# Altium PCB PWR_PCB2.PcbDoc (part 3 of 3)
Units mil, origin at the board's own origin, x right, y up, seen from the top; angles counter-clockwise.
Board outline 9000 x 6000 mil, 4 copper layers (Top Layer, GND Layer, Power Layer, Bottom Layer), stack 27.912 mil thick; 125 components, 92 nets, 479 pads, 4387 vias.
Unrouted connection lines stored in the file: 22.
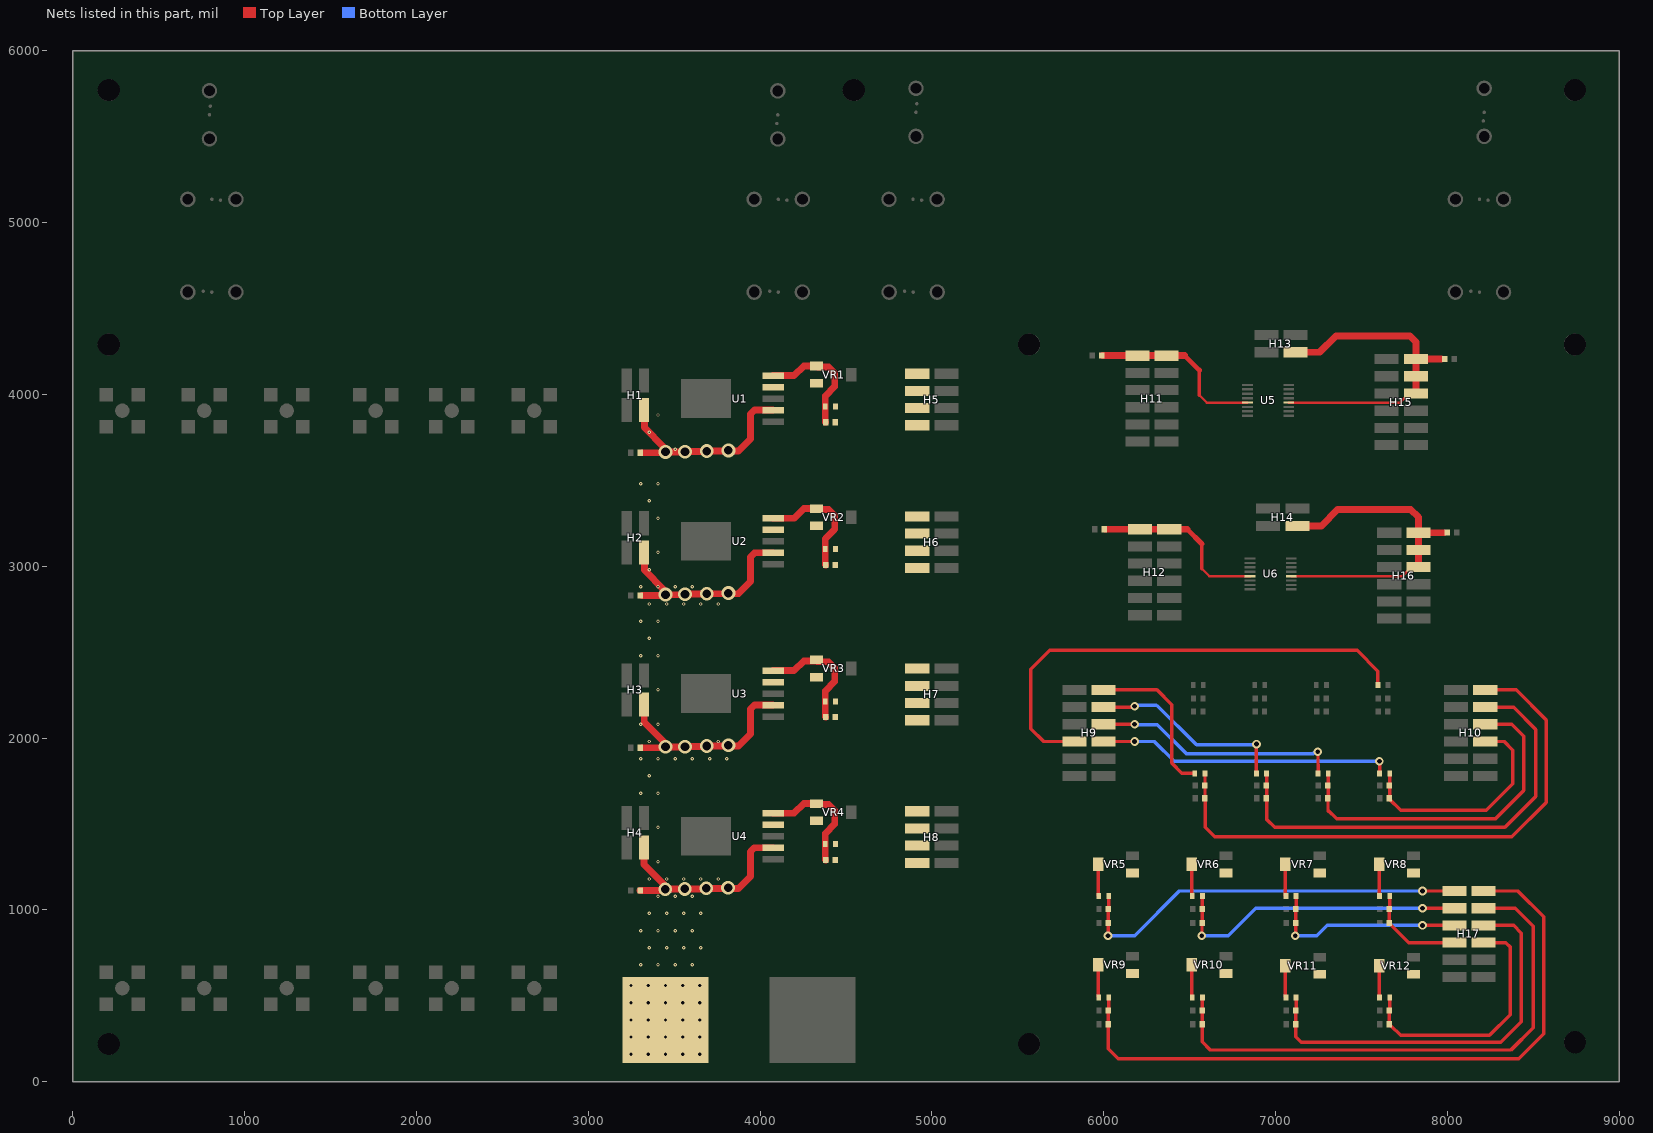
[diagram p5: the nets of this part, all layers, seen from the top]

## Via types
v1: diameter 20, hole 9, Top Layer to Bottom Layer, tented both sides, 2529 vias
v2: diameter 16, hole 8, Top Layer to Bottom Layer, 1158 vias
v3: diameter 20, hole 8, Top Layer to Bottom Layer, tented both sides, 408 vias
v4: diameter 16, hole 8, Top Layer to Bottom Layer, tented both sides, 156 vias
v5: diameter 50, hole 28, Top Layer to Bottom Layer, 70 vias
v6: diameter 30, hole 19, Top Layer to Bottom Layer, 50 vias
v7: diameter 80, hole 50, Top Layer to Bottom Layer, 16 vias

## Nets (pads, with @x,y where several pads share a name; then routed paths per layer and width w, separated by ;. In a path a pad name is that pad's centre, name@x,y a point inside that pad or via, vN(x,y) a via of type N, cw(c..) or ccw(c..) an arc to the next point about the centre after c; other vN are vias at no path point) (continued)
IREF3_M: H9.4 R8.2 | length 2826.5
  Top Layer w20: H9.4@5829.5,1980 5649.5,1980 5574.5,2055 5574.5,2400 5684.5,2510 7474.5,2510 7594.97,2389.53 R8.2@7594.97,2310
IREF4: C13.2 C21.2 H10.7 R9.1 | length 3309
  Top Layer w20: C21.2@6587.06,1650 6589.03,1651.97 6589.03,1725 R9.1@6589.03,1795 ; C21.2@6589.5,1645.06 6589.5,1480 6644.5,1425 8374.5,1425 8574.5,1625 8574.5,2105 8399.5,2280 H10.7@8219.5,2280
IREF4_M: H9.7 R9.2 | length 985.5
  Top Layer w20: H9.7@5944.5,2280 6309.5,2280 6394.5,2195 6394.5,1855 6454.5,1795 R9.2@6529.97,1795
IREF5: C14.2 C22.2 H10.8 R10.1 | length 2669.6
  Top Layer w20: R10.1@6947.36,1795 6947.36,1725 6947.36,1651.97 C22.2@6945.39,1650 6949.5,1645.89 6949.5,1525 6994.5,1480 8334.5,1480 8514.5,1660 8514.5,2050 8384.5,2180 H10.8@8219.5,2180
IREF5_M: H9.8 R10.2 | length 1200.5
  Top Layer w20: H9.8@5944.5,2180 6171.79,2180 6176.79,2185 v5(6179.5,2185) ; R10.2@6888.31,1795 6889.5,1796.19 6888.31,1797.39 6888.31,1964.81 v5(6888.5,1965)
  Bottom Layer w20: v5(6179.5,2185) 6184.5,2190 6304.5,2190 ; 6314.5,2185 6539.5,1960 6879.5,1960 v5@6884.5,1965
IREF6: C15.2 C23.2 H10.9 R11.1 | length 2014.7
  Top Layer w20: 7304.5,1575 7304.5,1649.23 C23.2@7303.73,1650 7305.69,1651.97 7305.69,1725 R11.1@7305.69,1795 ; 7307.69,1576.81 7354.5,1530 8279.5,1530 8444.5,1695 8444.5,2010 8374.5,2080 H10.9@8219.5,2080
IREF6_M: H9.9 R11.2 | length 1500.4
  Top Layer w20: H9.9@5944.5,2080 H9.9@5999.5,2080 v5(6179.5,2080) ; v5(7244.5,1920) 7246.41,1918.09 7246.41,1845.38 7246.64,1845.16 R11.2@7246.64,1795
  Bottom Layer w20: v5(6179.5,2080) 6181.41,2078.09 6311.41,2078.09 6479.5,1910 7217.78,1910 7222.04,1914.26 7238.76,1914.26 v5(7244.5,1920)
IREF7: C16.2 C24.2 H10.10 R12.1 | length 1331.2
  Top Layer w20: C24.2@7659.56,1647.5 7727.06,1580 ; C24.2@7662.06,1650 7664.03,1651.97 7664.03,1725 R12.1@7664.03,1795 ; 7729.5,1580 8224.5,1580 8379.5,1735 8379.5,1930 8329.5,1980 H10.10@8219.5,1980
IREF7_M: H9.10 R12.2 | length 1777.3
  Top Layer w20: H9.10@5944.5,1980 v5(6179.5,1980) ; v5(7603.67,1865) 7604.97,1863.7 R12.2@7604.97,1795
  Bottom Layer w20: v5(6179.5,1980) 6294.5,1980 6409.5,1865 v5(7603.67,1865)
IREF8: C29.2 C37.2 H17.1 R13.1 | length 2379.6
  Top Layer w20: v5(6024.5,850) 6026.41,851.91 6026.41,924.35 C37.2@6027.06,925 C29.2@6027.06,1005 6029.03,1006.97 R13.1@6029.03,1080 ; v5@7849.5,1110 v5(7854.5,1110) H17.1@8039.5,1110 H17.1@8059.5,1110
  Bottom Layer w20: v5(6024.5,850) 6179.5,850 6439.5,1110 v5(7854.5,1110)
IREF8_M: R13.2 VR5.2 | length 186.4
  Top Layer w20: VR5.2@5966.69,1265 5966.69,1083.28 R13.2@5969.97,1080
IREF9: C30.2 C38.2 H17.2 R14.1 | length 1788.1
  Top Layer w20: v5(6569.5,850) 6571.41,851.91 6571.41,924.35 C38.2@6572.06,925 C30.2@6572.06,1005 6574.03,1006.97 R14.1@6574.03,1080 ; v5(7854.5,1010) H17.2@8039.5,1010 H17.2@8059.5,1010
  Bottom Layer w20: v5(6569.5,850) 6724.5,850 6884.5,1010 v5(7854.5,1010)
IREF9_M: R14.2 VR6.2 | length 186.4
  Top Layer w20: VR6.2@6511.69,1265 6511.69,1083.28 R14.2@6514.97,1080
IREF10: C31.2 C39.2 H17.3 R15.1 | length 1209.2
  Top Layer w20: v5(7114.5,850) 7116.41,851.91 7116.41,924.35 C39.2@7117.06,925 C31.2@7117.06,1005 7119.03,1006.97 R15.1@7119.03,1080 ; v5@7849.5,910 v5(7854.5,910) H17.3@8039.5,910 H17.3@8059.5,910
  Bottom Layer w20: v5(7114.5,850) 7239.5,850 7299.5,910 v5(7854.5,910) v5@7857,910
IREF10_M: R15.2 VR7.2 | length 186.4
  Top Layer w20: VR7.2@7056.69,1265 7056.69,1083.28 R15.2@7059.97,1080
IREF11: C32.2 C40.2 H17.4 R16.1 | length 602
  Top Layer w20: R16.1@7664.03,1080 7664.03,1006.97 C32.2@7662.06,1005 C40.2@7662.06,925 7662.06,923.03 7775.09,810 H17.4@8039.5,810 H17.4@8059.5,810
IREF11_M: R16.2 VR8.2 | length 186.4
  Top Layer w20: VR8.2@7601.69,1265 7601.69,1083.28 R16.2@7604.97,1080
IREF12: C33.2 C41.2 H17.7 R17.1 | length 3987.2
  Top Layer w20: R17.1@6029.03,490 6029.03,416.97 C33.2@6027.06,415 C41.2@6027.06,335 6027.06,192.44 6084.5,135 8414.5,135 8560.01,280.51 8560.01,959.49 8409.5,1110 H17.7@8229.5,1110
IREF12_M: R17.2 VR9.2 | length 191.4
  Top Layer w20: VR9.2@5966.69,680 5966.69,493.28 R17.2@5969.97,490
IREF13: C34.2 C42.2 H17.8 R18.1 | length 3163.2
  Top Layer w20: R18.1@6574.03,490 6574.03,416.97 C34.2@6572.06,415 C42.2@6572.06,335 6572.06,232.44 6619.5,185 8369.5,185 8500.01,315.51 8500.01,904.49 8394.5,1010 H17.8@8229.5,1010
IREF13_M: R18.2 VR10.2 | length 191.4
  Top Layer w20: VR10.2@6511.69,680 6511.69,493.28 R18.2@6514.97,490
IREF14: C35.2 C43.2 H17.9 R19.1 | length 2338
  Top Layer w20: R19.1@7119.03,490 7119.03,416.97 C35.2@7117.06,415 C43.2@7117.06,335 7117.06,262.44 7149.5,230 8309.5,230 8430.01,350.51 8430.01,864.49 8384.5,910 H17.9@8229.5,910
IREF14_M: R19.2 VR11.2 | length 186.4
  Top Layer w20: VR11.2@7056.69,675 7056.69,493.28 R19.2@7059.97,490
IREF15: C36.2 C44.2 H17.10 R20.1 | length 1476.8
  Top Layer w20: R20.1@7664.03,490 7664.03,416.97 C36.2@7662.06,415 C44.2@7662.06,335 7662.06,333.03 7667.81,327.28 7669.78,327.28 7727.06,270 8244.5,270 8365.01,390.51 8365.01,784.49 8339.5,810 H17.10@8229.5,810
IREF15_M: R20.2 VR12.2 | length 186.4
  Top Layer w20: VR12.2@7601.69,675 7601.69,493.28 R20.2@7604.97,490
NC0: VR1.3
NC1: VR2.3
NC2: VR3.3
NC3: VR4.3
NetC5_1: C5.1 R1.1 U1.5 VR1.1 | length 709.9
  Top Layer w40: U1.5@4075.72,4108.86 4198.36,4108.86 4254.5,4165 VR1.1@4329.47,4165 4334.5,4160 4399.5,4160 4434.5,4125 4434.5,4045 4379.5,3990 4379.5,3839.94 C5.1@4381.94,3837.5
NetC6_1: C6.1 R2.1 U2.5 VR2.1 | length 709.9
  Top Layer w40: U2.5@4075.72,3278.86 4198.36,3278.86 4254.5,3335 VR2.1@4329.47,3335 4334.5,3330 4399.5,3330 4434.5,3295 4434.5,3215 4379.5,3160 4379.5,3009.94 C6.1@4381.94,3007.5
NetC7_1: C7.1 R3.1 U3.5 VR3.1 | length 709.9
  Top Layer w40: U3.5@4075.69,2392.78 4198.33,2392.78 4254.47,2448.92 4329.47,2448.92 4334.47,2443.92 4399.47,2443.92 4434.47,2408.92 4434.47,2328.92 4379.47,2273.92 4379.47,2123.86 C7.1@4381.91,2121.42
NetC8_1: C8.1 R4.1 U4.5 VR4.1 | length 709.9
  Top Layer w40: U4.5@4075.69,1562.78 4198.33,1562.78 4254.47,1618.92 VR4.1@4329.47,1618.92 4334.47,1613.92 4399.47,1613.92 4434.47,1578.92 4434.47,1498.92 4379.47,1443.92 4379.47,1293.86 C8.1@4381.91,1291.42
VDD0: C5.2 H5.2 H5.4 H5.6 H5.8 R1.2 U1.4
VDD1: C6.2 H6.2 H6.4 H6.6 H6.8 R2.2 U2.4
VDD2: C7.2 H7.2 H7.4 H7.6 H7.8 R3.2 U3.4
VDD3: C8.2 H8.2 H8.4 H8.6 H8.8 R4.2 U4.4 VR5.1 VR6.1 VR7.1 VR8.1 VR9.1 VR10.1 VR11.1 VR12.1
VDD12_0: C26.2 H13.1 H15.4 H15.5 H15.6 U5.4 | length 1963.3
  Top Layer w14: U5.4@7075.75,3952.2 7723.2,3952.2 H15.4@7776,4005 ; H15.4@7770.53,4005 H15.4@7776,4005 ; H15.4@7780.88,4009.88 H15.4@7776,4005 ; H15.4@7801,4005 H15.4@7776,4005
  Top Layer w40: H13.1@7116,4245 7256,4245 7351,4340 7781,4340 7816,4305 H15.6@7816,4205 ; H15.4@7816,4005 H15.5@7816,4105 H15.6@7816,4205 ; 7966,4205 H15.6@7816,4205
VDD12_1: C28.2 H14.1 H16.4 H16.5 H16.6 U6.4 | length 1962.5
  Top Layer w14: U6.4@7090.75,2942.2 7738.2,2942.2 H16.4@7791,2995 ; H16.4@7785.53,2995 H16.4@7791,2995 ; H16.4@7795.88,2999.88 H16.4@7791,2995 ; H16.4@7816,2995 H16.4@7791,2995
  Top Layer w40: H14.1@7126,3235 7266,3235 7361,3330 7786,3330 7831,3285 H16.6@7831,3195 ; H16.4@7831,2995 H16.5@7831,3095 H16.6@7831,3195 ; 7981,3195 H16.6@7831,3195
VDD33: C1.2 C2.2 C3.2 C4.2 H1.3 H2.3 H3.3 H4.3 P1.1 U1.2 U2.2 U3.2 U4.2 | length 5092.5
  Top Layer w40: C4.2@3302.03,1113.92 3440.72,1113.92 v7(3447.59,1120.8) 3448.24,1121.44 3560.66,1121.44 v7(3561.3,1122.09) ; C3.2@3312.03,1943.92 3444.62,1943.92 v7(3449.55,1948.85) ; C2.2@3312.06,2830 3444.65,2830 v7(3449.58,2834.92) ; C1.2@3312.06,3660 3444.65,3660 v7(3449.58,3664.92) ; H4.3@3324.47,1363.92 3324.47,1263.45 v7@3439.94,1147.98 ; H3.3@3324.47,2193.92 3326.42,2191.97 3326.42,2091.5 3441.89,1976.03 3441.89,1956.5 v7(3449.55,1948.85) ; H2.3@3324.5,3080 3326.45,3078.05 3326.45,2977.57 3441.92,2862.1 3441.92,2842.58 v7(3449.58,2834.92) ; H1.3@3324.5,3910 3326.45,3908.05 3326.45,3807.57 3441.92,3692.1 3441.92,3672.58 v7(3449.58,3664.92) ; P1.1@3449.5,563.5 P1.1@3451,565 ; P1.1@3536,446.5 P1.1@3536,565 ; v7@3563.26,1117.63 3567.65,1122.03 3687.58,1122.03 3689.47,1123.92 3874.47,1123.92 3944.47,1193.92 3944.47,1338.56 3967.9,1361.99 U4.2@4075.69,1361.99 ; U3.2@4075.69,2191.99 3967.9,2191.99 3944.47,2168.56 3944.47,2023.92 3874.47,1953.92 v7(3689.47,1953.92) 3687.58,1952.03 3567.65,1952.03 3563.26,1947.63 3450.76,1947.63 v7(3449.55,1948.85) ; U2.2@4075.72,3078.07 3967.93,3078.07 3944.5,3054.64 3944.5,2910 3874.5,2840 v7(3689.5,2840) 3687.61,2838.11 3567.68,2838.11 3563.29,2833.71 3450.79,2833.71 v7(3449.58,2834.92) ; U1.2@4075.72,3908.07 3967.93,3908.07 3944.5,3884.64 3944.5,3740 3874.5,3670 v7(3689.5,3670) 3687.61,3668.11 3567.68,3668.11 3563.29,3663.71 3450.79,3663.71 v7(3449.58,3664.92)
  other v1: 3306,680 3406,680 3506,680 3606,680 3356,780 3456,780 3556,780 3656,780 3306,880 3406,880 3506,880 3606,880 3356,980 3456,980 3556,980 3656,980 3406,1080 3506,1080 3606,1080 3356,1180 3456,1180 3556,1180 3656,1180 3756,1180 3406,1280 3406,1480 3306,1680 3406,1680 3356,1780 3306,1880 3406,1880 3506,1880 3606,1880 3706,1880 3806,1880 3356,1980 3756,1980 3306,2080 3406,2080 3406,2280 3306,2480 3406,2480 3356,2580 3306,2680 3406,2680 3356,2780 3456,2780 3556,2780 3656,2780 3756,2780 3306,2880 3406,2880 3506,2880 3606,2880 3356,2980 3406,3080 3406,3280 3356,3380 3306,3480 3406,3480 3506,3680 3356,3780 3406,3880
  other v6: 3249.5,160 3349.5,160 3449.5,160 3549.5,160 3649.5,160 3249.5,260 3349.5,260 3449.5,260 3549.5,260 3649.5,260 3249.5,360 3349.5,360 3449.5,360 3549.5,360 3649.5,360 3249.5,460 3349.5,460 3449.5,460 3549.5,460 3649.5,460 3249.5,560 3349.5,560 3449.5,560 3549.5,560 3649.5,560
  other v7: 3687.52,1125.88 3813.73,1129.66 3563.26,1950.13 3815.68,1957.71 3563.29,2836.21 3815.71,2843.79 3563.29,3666.21 3815.71,3673.79
VDD33_FPGA_0: C25.2 H11.6 H11.12 U5.13 | length 1040.7
  Top Layer w14: 6556,3995 6598.8,3952.2 U5.13@6836.25,3952.2
  Top Layer w20: 6556,3995 6556,4140
  Top Layer w30: 6471,4225 6556,4140
  Top Layer w40: C25.2@5993.44,4225 H11.12@6196,4225 H11.6@6366,4225 6471,4225
VDD33_FPGA_1: C27.2 H12.6 H12.12 U6.13 | length 1040.7
  Top Layer w14: 6571,2985 6613.8,2942.2 U6.13@6851.25,2942.2
  Top Layer w20: 6571,2985 6571,3130
  Top Layer w30: 6486,3215 6571,3130
  Top Layer w40: C27.2@6008.44,3215 H12.12@6211,3215 H12.6@6381,3215 6486,3215
pads on no net: H9.6 H9.12 H10.6 H10.12 H11.9 H11.10 H12.9 H12.10 H17.6 H17.12 VR5.3 VR6.3 VR7.3 VR8.3 VR9.3 VR10.3 VR11.3 VR12.3

## Polygon pours and split planes (outlines as drawn)
GND on Top Layer "Top Layer-No Net 1" (solid, remove dead copper, pour order 20): 1532,4351.5 1532,-13.5 9000,-13.5 9000,6000 4546,6000 4546,4351.5
VDD33 on Top Layer "Top Layer-No Net" (solid, remove dead copper, pour order 16): 3284,565 3699.5,565 3699.5,1041.42 3885.97,1041.42 3885.97,1206.42 3461,1206.42 3461,1868.92 3885.97,1868.92 3885.97,2033.92 3461,2033.92 3461,2755 3886,2755 3886,2920 3461,2920 3461,3585 3886,3585 3886,3750 3461,3750 3461,4000 3284,4000
VDD3 on Top Layer "Top Layer-VDD3" (solid, remove dead copper, pour order 9): 4664.5,461 7909.5,461 7909.5,777.5 5304.5,777.5 5304.5,1045 7909.5,1045 7909.5,1362.75 5304.5,1362.75 5304.5,1185 4999.47,1185 4999.47,1673.92 3974.47,1673.92 3974.47,1463.92 4184.47,1463.92 4184.47,1183.92 4664.5,1183.92
VDD2 on Top Layer "VDD2_L01_P002" (solid, remove dead copper, pour order 2): 3974.47,2293.92 4184.47,2293.92 4184.47,2013.92 4999.47,2013.92 4999.47,2503.92 3974.47,2503.92
VDD1 on Top Layer "VDD1_L01_P001" (solid, remove dead copper, pour order 1): 3974.5,3180 4184.5,3180 4184.5,2900 4999.5,2900 4999.5,3390 3974.5,3390
VDD0 on Top Layer "VDD0_L01_P000" (solid, remove dead copper, pour order 0): 3974.5,4010 4184.5,4010 4184.5,3730 4999.5,3730 4999.5,4220 3974.5,4220
GND on Bottom Layer "GND_L04_P021" (solid, remove dead copper, pour order 21): 0,0 9000,0 9000,6000 0,6000
VDD33 on Power Layer (split plane): 8979.9,20.1 20.1,20.1 20.1,5979.9 8979.9,5979.9
GND on GND Layer (split plane): 8979.9,20.1 20.1,20.1 20.1,5979.9 8979.9,5979.9

## Keep-outs
Top Layer:
  region: 4435,5770 ccw(c4545,5770) 4545,5660 ccw(c4545,5770) 4655,5770 ccw(c4545,5770) 4545,5880 ccw(c4545,5770)
  region: 100,5770 ccw(c210,5770) 210,5660 ccw(c210,5770) 320,5770 ccw(c210,5770) 210,5880 ccw(c210,5770)
  region: 100,4290 ccw(c210,4290) 210,4180 ccw(c210,4290) 320,4290 ccw(c210,4290) 210,4400 ccw(c210,4290)
  region: 100,220 ccw(c210,220) 210,110 ccw(c210,220) 320,220 ccw(c210,220) 210,330 ccw(c210,220)
  region: 8631,5770 ccw(c8741,5770) 8741,5660 ccw(c8741,5770) 8851,5770 ccw(c8741,5770) 8741,5880 ccw(c8741,5770)
  region: 8631,4290 ccw(c8741,4290) 8741,4180 ccw(c8741,4290) 8851,4290 ccw(c8741,4290) 8741,4400 ccw(c8741,4290)
  region: 8631,230 ccw(c8741,230) 8741,120 ccw(c8741,230) 8851,230 ccw(c8741,230) 8741,340 ccw(c8741,230)
  region: 5456,220 ccw(c5566,220) 5566,110 ccw(c5566,220) 5676,220 ccw(c5566,220) 5566,330 ccw(c5566,220)
  region: 5456,4290 ccw(c5566,4290) 5566,4180 ccw(c5566,4290) 5676,4290 ccw(c5566,4290) 5566,4400 ccw(c5566,4290)

## Other copper
Top Layer:
  rectangle net GND: 4006.5,47.75 4617.5,660.75
  rectangle net GND: 4030,72 4593,637
  rectangle net VDD33: 3199.5,583.73 3699.5,651.25

## Silkscreen, mask and mechanical layers (free items; w line width, h text height)
Top Overlay:
  drawing of 635 lines, arcs and shapes, not listed
  text "12" at 6177,4294 h40
  text "6" at 6353,4294 h40
  text "12" at 7622,4277 h40
  text "6" at 7796,4275 h40
  text "VDD0" at 4838,4200 h40
  text "VSS" at 5040,4200 h40
  text "1" at 6366,3616 h40
  text "7" at 6191,3611 h40
  text "1" at 7806,3592 h40
  text "7" at 7634,3590 h40
  text "VDD1" at 4844,3368 h40
  text "VSS" at 5046,3368 h40
  text "6" at 6355,3288 h40
  text "12" at 6198,3287 h40
  text "12" at 7632,3268 h40
  text "6" at 7815,3265 h40
  text "1" at 6367,2604 h40
  text "7" at 6193,2602 h40
  text "1" at 7828,2583 h40
  text "7" at 7653,2582 h40
  text "VDD2" at 4845,2482 h40
  text "VSS" at 5047,2482 h40
  text "1" at 6539.75,2385.25 h60
  text "2" at 6878.75,2385.25 h60
  text "3" at 7237.75,2385.25 h60
  text "4" at 7596.75,2385.25 h60
  text "1" at 8048,2363 h40
  text "1" at 5827,2361 h40
  text "7" at 8205,2361 h40
  text "7" at 5984,2359 h40
  text "5" at 6529.75,1866.75 h60
  text "6" at 6885.42,1866.75 h60
  text "7" at 7241.08,1866.75 h60
  text "8" at 7596.75,1866.75 h60
  text "6" at 8033,1671 h40
  text "12" at 8195,1669 h40
  text "12" at 5974,1667 h40
  text "6" at 5812,1666 h40
  text "VDD3" at 4837,1651 h40
  text "VSS" at 5039,1651 h40
  text "1" at 6109,1390.5 h60
  text "2" at 6637.59,1390.5 h60
  text "3" at 7186.17,1390.5 h60
  text "4" at 7734.75,1390.5 h60
  text "1" at 8031,1191 h40
  text "7" at 8188,1189 h40
  text "5" at 6099,805.5 h60
  text "6" at 6644.25,805.5 h60
  text "7" at 7189.5,805.5 h60
  text "8" at 7734.75,805.5 h60
  text "200Gbps TX Power Board V1" at 4724,722 h30
  text "Feb 2021" at 4916,651 h30
  text "VDD33" at 3210,628 h60
  text "GND" at 4088,628 h60
  text "12" at 8178,497 h40
  text "6" at 8016,496 h40
Top Solder:
  lines w60: 289,545 289,3905 ; 766,545 941,545 1001,605 1001,3845 941,3905 766,3905 ; 796.5,5626.5 4103,5626.5 ; 810,4595 810,4800 870,4860 4046,4860 4106,4800 4106,4595 ; 810,5135 810,4930 870,4870 4046,4870 ; 1246,545 1071,545 1011,605 1011,3845 1071,3905 1246,3905 ; 1763,545 1763,3905 ; 2206,545 2381,545 2441,605 2441,3845 2381,3905 2206,3905 ; 2686,545 2511,545 2451,605 2451,3845 2511,3905 2686,3905 ; 4890,4595 4890,4800 4950,4860 8126,4860 8186,4800 8186,4595 ; 4890,5135 4890,4930 4950,4870 8126,4870 ; 4907.25,5640.75 8213.75,5640.75 ; 4046,4870 4106,4930 ; 4046,4870 4106,4930 ; 4106,4930 4106,5135 4106,4930 ; 8126,4870 8186,4930 ; 8126,4870 8186,4930 ; 8186,4930 8186,5135 8186,4930
Mechanical 1:
  the board outline again, w10